# EAGLE board Two stage power demo (EAGLE 5.10)
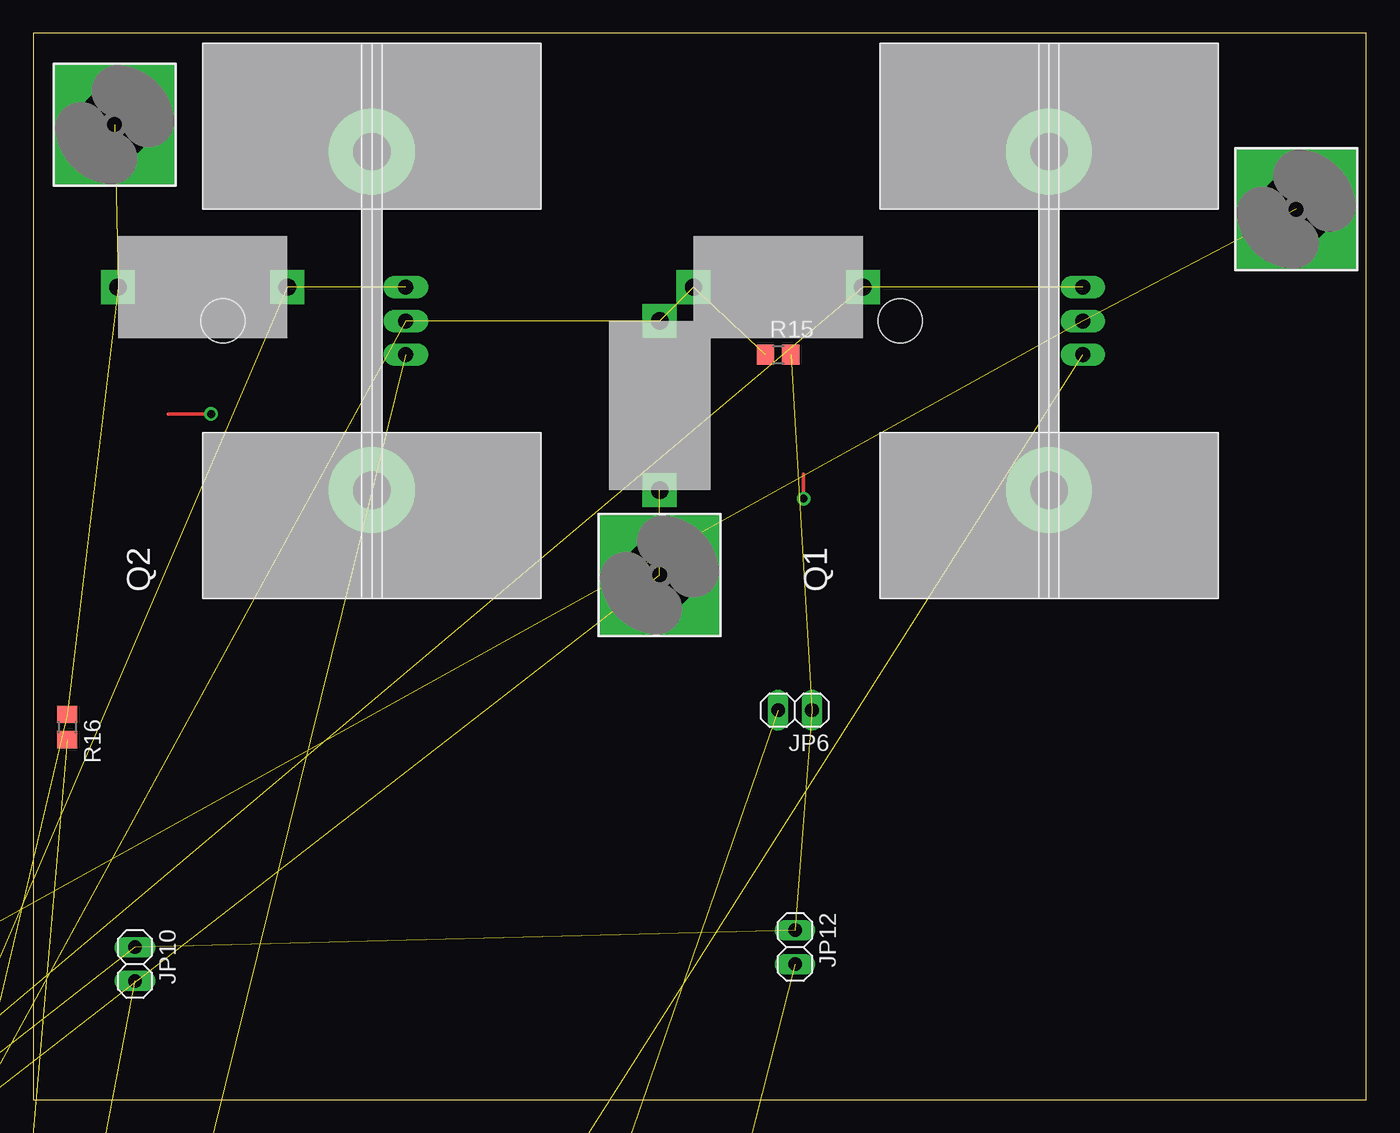
[diagram p0: board, top side]
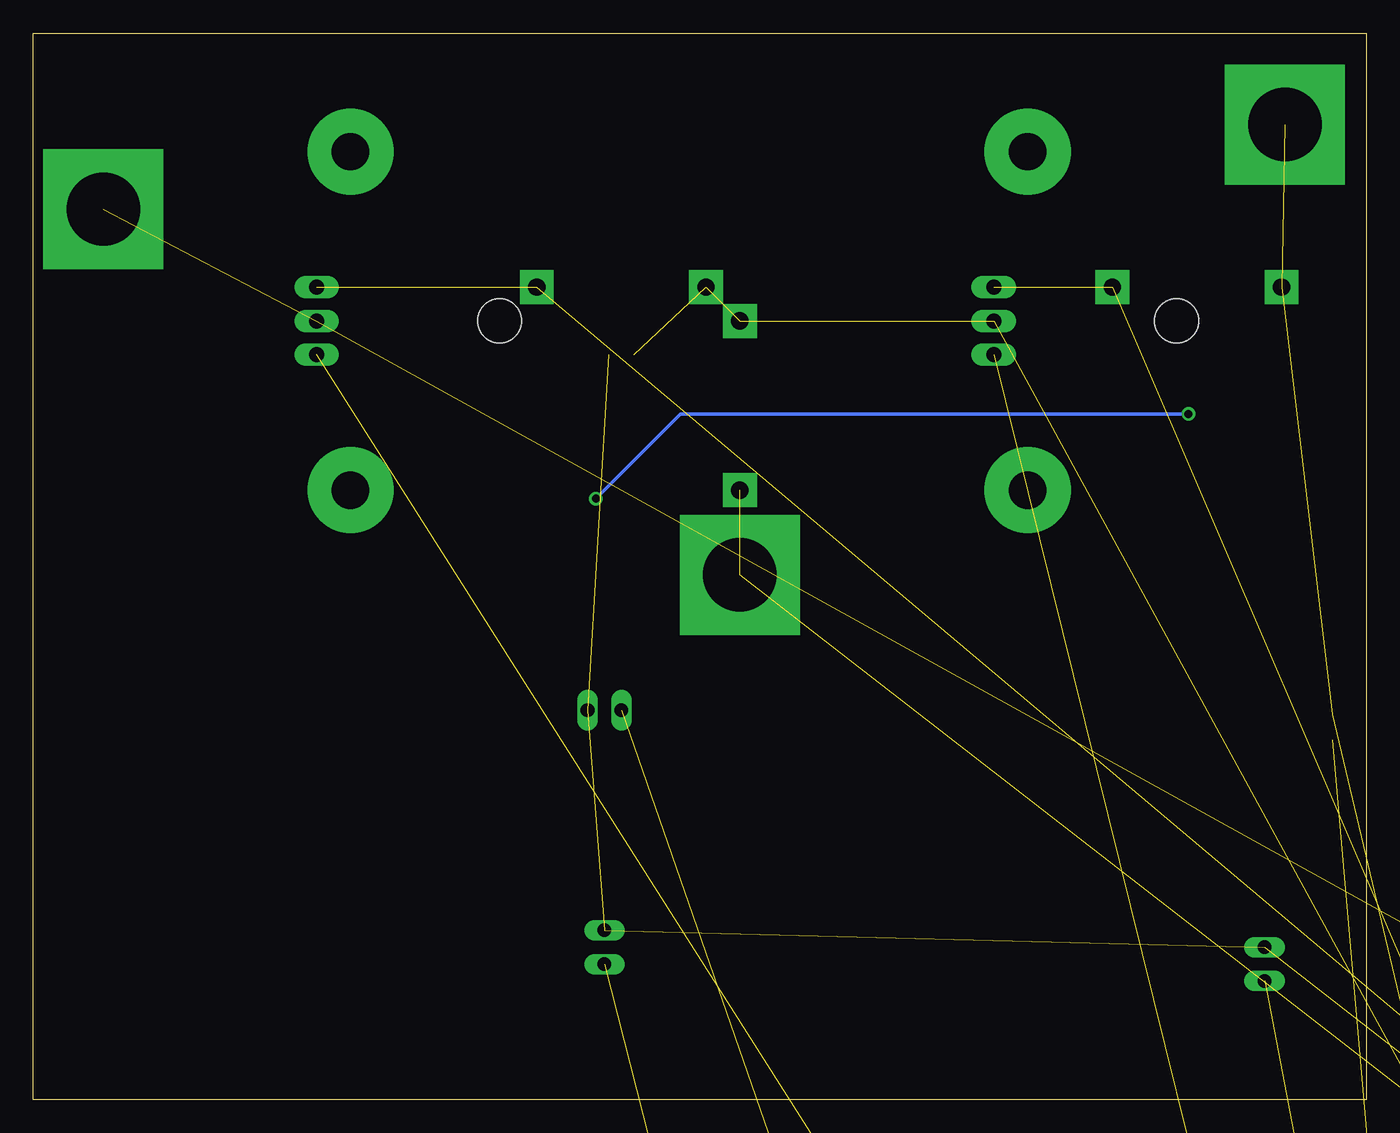
[diagram p1: board, bottom side, seen from below]

Size 100 x 80 mm. Coordinates in mm from the lower left corner, seen from the top.
Outline: 0,0 100,0 100,80 0,80 0,0
Copper layers (1*16): Top 0.035mm / dielectric 1.5mm / Bottom 0.035mm
Design rules "default": minimum track width 10mil, minimum drill 24mil, track to track 8mil, track to pad 8mil, pad to pad 8mil, via to via 8mil, smd to smd 8mil, copper to edge 40mil, drill to drill 8mil, minimum pad ring 10mil, minimum via ring 8mil, stop-mask expansion 4mil, vias tented up to drill 0mil, thermal gap 10mil

## Footprints (pad centres in the part's own frame; a part is rotated, then mirrored left to right if it is on the bottom)
5,5-PAD-SQUARE = drill 5.5 pad 9 square: B5,5 0,0
C150-054X183 = drill 1.016 octagon: 1 -7.493,0; 2 7.493,0
E5-10,5 = drill 1.016 pad 2.54 round: + -2.54,0 | drill 1.016 pad 2.54 octagon: - 2.54,0
E2,5-7 = drill 0.813 pad 1.6 round: + -1.27,0 | drill 0.813 pad 1.6 octagon: - 1.27,0
E2-4 = drill 0.813 pad 1.27 round: + -1.016,0 | drill 0.813 pad 1.27 octagon: - 1.016,0
SO08 = smd 0.6 x 2.2: 1 -1.905,-2.6; 2 -0.635,-2.6; 3 0.635,-2.6; 4 1.905,-2.6; 5 1.905,2.6; 6 0.635,2.6; 7 -0.635,2.6; 8 -1.905,2.6
1X02 = drill 1.016 long: 1 -1.27,0; 2 1.27,0
TO220-W/657-20ABP = drill 1.118 long: 1 -2.54,-2.54; 2 0,-2.54; 3 2.54,-2.54 | drill 2.8 pad 6.452 round: P$1 -12.7,0; P$2 12.7,0 | hole 3.302: 0,11.176
0411/12 = drill 0.914 octagon: 1 -6.35,0; 2 6.35,0
R0805 = smd 1.3 x 1.5: 1 -0.95,0; 2 0.95,0
SOT323 = smd 0.5 x 1: 1 0,0.9; 2 -0.65,-0.9; 3 0.65,-0.9
630HR050E = drill 1.3 pad 2.54 square: P$1 -6.35,0; P$2 6.35,0

## Placement (x,y rotation side)
BATTERY-  MOUNT-PAD-SQUARE5.5  [5,5-PAD-SQUARE]  46.99,39.37 0 top
BATTERY/CHARGER+  MOUNT-PAD-SQUARE5.5  [5,5-PAD-SQUARE]  94.74,66.8 0 top
C1  [C150-054X183]  -21.08,-100.08 0 top  (outside the outline)
C2  [C150-054X183]  -23.62,-141.73 0 top  (outside the outline)
C3  [C150-054X183]  -23.62,-164.59 0 top  (outside the outline)
C4  [C150-054X183]  -23.62,-187.45 0 top  (outside the outline)
C5  470u  [E5-10,5]  -28.19,-210.82 0 top  (outside the outline)
C6  470u  [E5-10,5]  -28.7,-221.74 0 top  (outside the outline)
C7  470u  [E5-10,5]  -29.21,-232.66 0 top  (outside the outline)
C8  470u  [E5-10,5]  -29.72,-243.59 0 top  (outside the outline)
C9  100u  [E2,5-7]  -31.75,-253.24 0 top  (outside the outline)
C10  0.1u  [E2-4]  -33.53,-260.1 0 top  (outside the outline)
C11  0.1u  [E2-4]  -33.53,-265.18 0 top  (outside the outline)
C12  0.1u  [E2-4]  -33.53,-270.26 0 top  (outside the outline)
CHARGER-  MOUNT-PAD-SQUARE5.5  [5,5-PAD-SQUARE]  6.1,73.15 0 top
IC1  OPA2277U  [SO08]  -15.24,-2.29 0 top  (outside the outline)
IC2  OPA2277U  [SO08]  -24.64,-2.54 0 top  (outside the outline)
IC6  OPA2277U  [SO08]  -5.84,4.06 0 top  (outside the outline)
JP1  [1X02]  -33.78,-287.02 0 top  (outside the outline)
JP2  [1X02]  -7.37,-3.81 0 top  (outside the outline)
JP3  [1X02]  -34.8,-303.02 0 top  (outside the outline)
JP6  [1X02]  57.15,29.21 180 top
JP10  [1X02]  7.62,10.16 270 top
JP12  [1X02]  57.15,11.43 270 top
Q1  RFP12N10L  [TO220-W/657-20ABP]  76.2,58.42 90 top
Q2  RFP12N10L  [TO220-W/657-20ABP]  25.4,58.42 90 top
Q3  RFP12N10L  [TO220-W/657-20ABP]  -8.13,-26.42 0 top  (outside the outline)
Q4  RFP12N10L  [TO220-W/657-20ABP]  -8.13,-67.31 0 top  (outside the outline)
R1  100k  [0411/12]  -23.88,-114.3 0 top  (outside the outline)
R2  [0411/12]  -25.4,-150.11 0 top  (outside the outline)
R3  100k  [0411/12]  -24.38,-120.9 0 top  (outside the outline)
R4  [0411/12]  -25.4,-157.48 0 top  (outside the outline)
R5  [0411/12]  -25.4,-172.97 0 top  (outside the outline)
R6  [0411/12]  -25.4,-180.34 0 top  (outside the outline)
R7  [0411/12]  -22.1,-92.96 0 top  (outside the outline)
R8  [0411/12]  -23.37,-107.7 0 top  (outside the outline)
R9  100k  [0411/12]  -24.89,-127.51 0 top  (outside the outline)
R10  100k  [0411/12]  -25.4,-134.11 0 top  (outside the outline)
R13  100k  [R0805]  -43.94,-328.68 0 top  (outside the outline)
R14  100k  [R0805]  -49.78,-328.68 0 top  (outside the outline)
R15  0  [R0805]  55.88,55.88 0 top
R16  0  [R0805]  2.54,27.94 270 top
R17  [0411/12]  -25.4,-195.83 0 top  (outside the outline)
R18  [0411/12]  -25.4,-203.2 0 top  (outside the outline)
R19  [0411/12]  -28.96,-280.92 0 top  (outside the outline)
R20  [0411/12]  -29.72,-293.62 0 top  (outside the outline)
R21  15k  [0411/12]  -30.73,-309.63 0 top  (outside the outline)
R22  1k  [0411/12]  -31.24,-316.23 0 top  (outside the outline)
R23  1k  [0411/12]  -31.75,-322.83 0 top  (outside the outline)
R24  15k  [0411/12]  -32.51,-329.44 0 top  (outside the outline)
R25  100k  [R0805]  -55.63,-328.68 0 top  (outside the outline)
R26  100k  [R0805]  -61.21,-328.68 0 top  (outside the outline)
T1  [SOT323]  -34.8,-275.08 0 top  (outside the outline)
T2  [SOT323]  -36.58,-297.69 0 top  (outside the outline)
U$1  630HR050E  [630HR050E]  55.88,60.96 0 top
U$2  630HR050E  [630HR050E]  46.99,52.07 90 top
U$3  630HR050E  [630HR050E]  12.7,60.96 0 top
U$4  630HR050E  [630HR050E]  -21.34,-43.69 0 top  (outside the outline)
U$5  630HR050E  [630HR050E]  -21.34,-84.58 0 top  (outside the outline)

## Library data of the parts
BATTERY- BATTERY/CHARGER+ CHARGER- = holes
C1-C12 R1-R10 R13-R26 = rcl
IC1 IC2 IC6 = linear
JP1-JP3 JP6 JP10 JP12 = pinhead
Q1-Q4 U$1-U$5 = NEWPARTS
T1 T2 = zetex

## Nets
+5V: C6.+ C7.+ C11.+ JP6.2 T1.1
GND: C1.2 C6.- C7.- C11.- IC1.4 JP1.1 JP6.1 JP10.1 JP12.1 R14.1 R15.2 R19.1 R22.2
LOAD: BATTERY/CHARGER+.B5,5 C5.+ C8.+ C9.+ C10.+ C12.+ IC2.8 Q1.2 T2.1
LOAD1: Q3.2
LOAD2: C2.2 JP2.2 Q2.2 Q4.2 R15.1 U$1.P$1 U$2.P$2 U$4.P$1
N$1: IC1.7
N$3: IC6.2 Q2.3 R10.1 R23.2 R26.1 U$3.P$2
N$4: IC2.2 R13.1 R14.2
N$5: BATTERY-.B5,5 JP2.1 U$2.P$1
N$6: IC1.8 R19.2 T1.3
N$7: JP1.2 T1.2
N$8: IC2.1 R13.2 R24.1
N$9: IC1.6 Q3.3 R3.1 U$4.P$2
N$10: Q1.1 R1.2 R7.2 R8.2
N$11: IC1.3 IC1.5 R21.1 R22.1
N$12: IC6.6 Q4.3 R9.1 U$5.P$2
N$13: C1.1 R8.1
N$14: Q3.1 R2.2 R3.2 R4.2
N$15: C2.1 R4.1
N$16: Q4.1 R5.2 R6.2 R9.2
N$17: C3.2 C5.- C8.- C9.- C10.- C12.- CHARGER-.B5,5 IC2.4 IC6.4 JP3.1 R16.1 R20.1 U$3.P$1 U$5.P$1
N$18: C3.1 R6.1
N$19: IC2.3 R25.2 R26.2
N$20: Q2.1 R10.2 R17.2 R18.2
N$21: IC1.2 Q1.3 R1.1 U$1.P$2
N$22: C4.1 R18.1
N$23: IC1.1 R7.1
N$24: C4.2 R16.2
N$25: IC6.7 R5.1
N$26: IC6.1 R17.1
N$27: JP12.2 R21.2
N$28: JP10.2 R25.1
N$29: IC6.8 R20.2 T2.3
N$30: IC6.3 IC6.5 R23.1 R24.2
N$32: JP3.2 T2.2

## Tracks (layer width: path | path; a pad name or v marks a point on that pad's centre or on a via)
+5V  (4 unrouted)
GND  (12 unrouted)
LOAD  (8 unrouted)
LOAD2  (7 unrouted)
N$3  (5 unrouted)
N$4  (2 unrouted)
N$5  (2 unrouted)
N$6  (2 unrouted)
N$7  (1 unrouted)
N$8  (2 unrouted)
N$9  (3 unrouted)
N$10  (3 unrouted)
N$11  (3 unrouted)
N$12  (3 unrouted)
N$13  (1 unrouted)
N$14  (3 unrouted)
N$15  (1 unrouted)
N$16  (3 unrouted)
N$17  (13 unrouted)
N$18  (1 unrouted)
N$19  (2 unrouted)
N$20  (3 unrouted)
N$21  (3 unrouted)
N$22  (1 unrouted)
N$23  (1 unrouted)
N$24  (1 unrouted)
N$25  (1 unrouted)
N$26  (1 unrouted)
N$27  (1 unrouted)
N$28  (1 unrouted)
N$29  (2 unrouted)
N$30  (3 unrouted)
N$32  (1 unrouted)
NC  (via drill 0.61)
  Top 0.254: 10.1,51.44 v13.34,51.44 | v57.78,45.09 57.78,46.93
  Bottom 0.254: v13.34,51.44 51.44,51.44 v57.78,45.09